# Altium PCB MotorDriverPCB.PcbDoc (part 1 of 2)
Units mm, origin at the board's own origin, x right, y up, seen from the top; angles counter-clockwise.
Board outline 100 x 50 mm, 2 copper layers (Top Layer, Bottom Layer); 108 components, 75 nets, 333 pads, 594 vias.
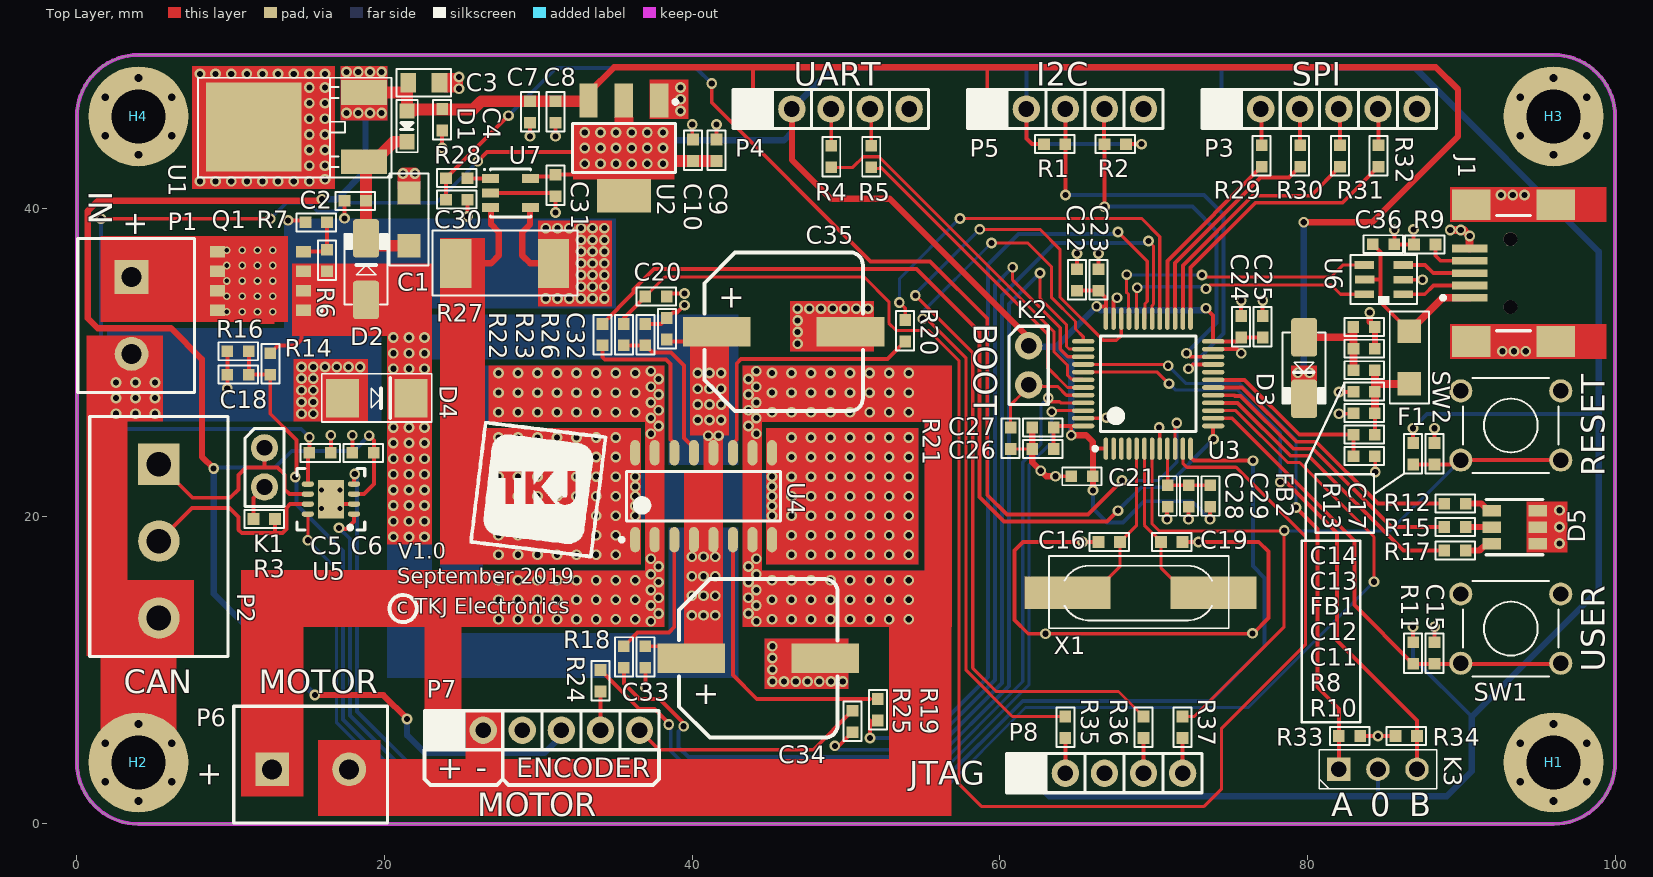
[diagram p0: Top Layer view]
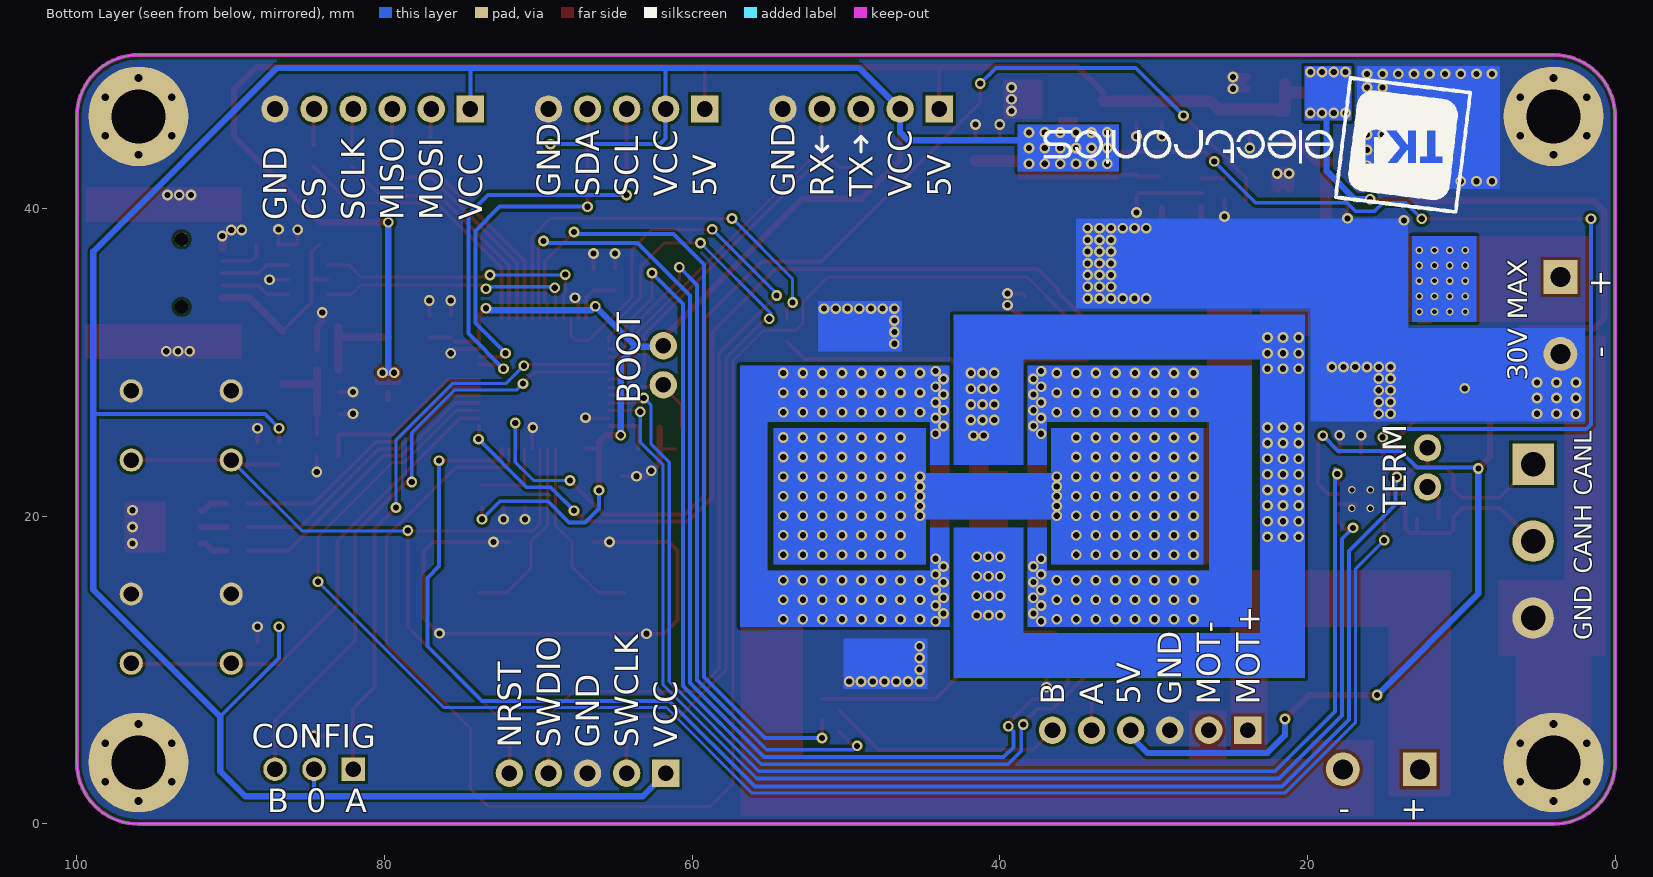
[diagram p1: Bottom Layer view, seen from below]

## Layer stack, top to bottom
Top Layer: signal copper 0.0356
Dielectric: dielectric 0.32, FR-4, Dk 4.8
Bottom Layer: signal copper 0.0356

## Board outline
0,4 ccw(c4,4) 4,0 96,0 ccw(c96,4) 100,4 100,46 ccw(c96,46) 96,50 4,50 ccw(c4,46) 0,46

## Design rules (kind name [scope] priority, off if disabled: settings)
Clearance [All] p1: gap=0.191
DiffPairsRouting [All] p1: maxlimit=0.254 minlimit=0.254 mostfreqgap=0.254 maxuncoupledlength=12.7
HoleSize [All] p1: absolutevalues=TRUE maxlimit=12.7 minlimit=0.025 maxpercent=80.000 minpercent=20.000
HoleToHoleClearance [All] p1: gap=0.203 allowstackedmicrovias=TRUE
MinimumSolderMaskSliver [All] p1: minsoldermaskwidth=0.025
PolygonConnect [All] p1: connectstyle=Direct reliefconductorwidth=0.254 reliefentries=4 polygonreliefangle="90 Angle" airgapwidth=0.254
RoutingVias [All] p1: holewidth=0.4 width=0.7 viastyle="Through Hole" minholewidth=0.4 minwidth=0.7 maxholewidth=0.4 maxwidth=0.7
SilkToSilkClearance [All] p1: silktosilkclearance=0.076
SilkscreenOverComponentPads [All] p1: minsilkscreentomaskgap=0.076
SolderMaskExpansion [All] p1: expansion=0.102
Width [All] p1: maxlimit=1.27 minlimit=0.203 preferedwidth=0.254 minimp=50.000000 maximp=50.000000 favimp=50.000000
22 further rules are at their usual default settings.

## Classes and differential pairs
differential pair USB: +USB_P -USB_N
differential pair USBX: +USBX_P -USBX_N

## Components (designator, comment, footprint, x,y, rotation, side; value= is the part's Value field where it differs from the comment)
C1 "10uF, 50V" 1206C-GENERIC 21.59,37.592 r90 top
C2 "100nF" 0603C-GENERIC 18.796,40.513 r180 top
C3 "10uF, 6.3V" 0805C-GENERIC 21.793,48.184 r0 top
C4 "100nF" 0603C-GENERIC 23.749,46.482 r270 top
C5 "100nF" 0603C-GENERIC 15.113,24.13 r0 top
C6 "100nF" 0603C-GENERIC 19.304,24.13 r180 top
C7 "1uF, 10V" 0603C-GENERIC 29.464,46.99 r270 top
C8 "100nF" 0603C-GENERIC 31.115,46.99 r270 top
C9 "1uF, 10V" 0603C-GENERIC 41.58,43.104 r90 top
C10 "100nF" 0603C-GENERIC 40.056,43.104 r90 top
C11 "4u7, 6.3V" 0603C-GENERIC 84.383,26.706 r180 top
C12 "10nF" 0603C-GENERIC 84.383,28.103 r180 top
C13 "100nF" 0603C-GENERIC 82.986,30.897 r0 top
C14 "4u7, 6.3V" 0603C-GENERIC 82.982,32.309 r0 top
C15 "100nF" 0603C-GENERIC 88.265,10.414 r90 top
C16 "18pF, NP0/COG 1%" 0603C-GENERIC 66.421,18.339 r0 top
C17 "100nF" 0603C-GENERIC 88.265,23.368 r90 top
C18 "1uF, 10V" 0603C-GENERIC 11.176,29.21 r180 top
C19 "18pF, NP0/COG 1%" 0603C-GENERIC 71.882,18.339 r180 top
C20 "10nF" 0603C-GENERIC 36.957,34.29 r0 top
C21 "100nF" 0603C-GENERIC 66.04,22.606 r180 top
C22 "100nF" 0603C-GENERIC 65.024,34.671 r90 top
C23 "4u7, 6.3V" 0603C-GENERIC 66.421,34.671 r90 top
C24 "100nF" 0603C-GENERIC 75.692,31.623 r90 top
C25 "4u7, 6.3V" 0603C-GENERIC 77.089,31.623 r90 top
C26 "100nF" 0603C-GENERIC 63.5,24.384 r180 top
C27 "4u7, 6.3V" 0603C-GENERIC 63.5,25.781 r180 top
C28 "10nF" 0603C-GENERIC 70.917,22.022 r270 top
C29 "1uF, 10V" 0603C-GENERIC 72.288,22.022 r270 top
C30 "10nF" 0603C-GENERIC 24.003,40.589 r0 top
C31 "100nF" 0603C-GENERIC 31.115,42.215 r270 top
C32 "100nF" 0603C-GENERIC 38.354,31.496 r90 top
C33 "100nF" 0603C-GENERIC 36.957,11.557 r270 top
C34 "470uF, 35V" SMT_10x10.5 44.298,10.77 r180 top
C35 "470uF, 35V" SMT_10x10.5 45.942,32.004 r180 top
C36 "100nF" 0603C-GENERIC 84.238,37.691 r0 top
D1 "DNP (NSR0530HT1G)" SOD323 21.463,46.355 r90 top
D2 "CDBA140-G" DO-214AC-SMA 18.796,36.068 r90 top
D3 "CDBA140-G" DO-214AC-SMA 79.781,29.642 r270 top
D4 "SMBJ26A" DO-214AA 17.272,27.686 r180 top
D5 "LED RGB Individual" LED-3535-6 93.472,19.304 r0 top
F1 "0ZCJ0035FF2G" 1206C-GENERIC 86.618,32.04 r270 top
FB1 "BK1608TS102" 0603FB-GENERIC 84.383,29.5 r180 top
FB2 "BK1608TS102" 0603FB-GENERIC 73.685,20.625 r90 top
H1 "SCREW-HOLE" Screw-hole-3mm 96,4 r0 top
H2 "SCREW-HOLE" Screw-hole-3mm 4,4 r0 top
H3 "SCREW-HOLE" Screw-hole-3mm 96,46 r0 top
H4 "SCREW-HOLE" Screw-hole-3mm 4,46 r0 top
J1 "USB Type B" USB-MINI-B 94.488,35.814 r180 top
K1 "JMPR2" JMPR2 12.196,24.452 r0 top
K2 "JMPR2" JMPR2 61.874,31.09 r0 top
K3 "JMPR3-23" JMPR3-CLOSED-23 82.042,3.556 r0 top
P1 "TB002-500-02BE" SCREW-2-5mm 3.556,35.56 r270 top
P2 "VI0301550000G" SCREW-3-5mm 5.334,23.39 r270 top
P3 "Header 6" HEADER-1X6 74.422,46.482 r90 top
P4 "UART1" HEADER-1X5 43.942,46.482 r90 top
P5 "I2C1" HEADER-1X5 59.182,46.482 r90 top
P6 "TB002-500-02BE" SCREW-2-5mm 12.7,3.556 r0 top
P7 "Header 6" HEADER-1X6 23.876,6.096 r90 top
P8 "JTAG" HEADER-1X5 61.722,3.302 r90 top
Q1 "AONS21321" SO8FL-DFN5x6 11.938,35.306 r180 top
R1 "4K7" 0603R-4K7 62.865,44.196 r0 top
R2 "4K7" 0603R-4K7 68.199,44.196 r180 top
R3 "120R" 0603R-120 11.485,19.829 r0 top
R4 "1K" 0603R-1k 49.042,42.69 r90 top
R5 "1K" 0603R-1k 51.642,42.69 r90 top
R6 "10K" 0603R-10K 16.256,37.338 r270 top
R7 "4K7" 0603R-4K7 16.256,39.116 r180 top
R8 "4K7" 0603R-4K7 84.383,25.309 r180 top
R9 "100K" 0603R-100K 88.32,37.679 r180 top
R10 "10K" 0603R-10K 84.383,23.912 r180 top
R11 "10K" 0603R-10K 86.868,10.414 r90 top
R12 "82R" 0603R-82 88.9,20.828 r0 top
R13 "10K" 0603R-10K 86.868,23.368 r90 top
R14 "18.2K (1%)" 0603R-18K 12.573,30.607 r270 top
R15 "56R" 0603R-56 88.9,19.304 r0 top
R16 "2.21K (1%)" 0603R-2K2 11.176,30.734 r180 top
R17 "27R" 0603R-27 88.9,17.78 r0 top
R18 "1K" 0603R-1k 35.56,10.16 r90 top
R19 "1K" 0603R-1k 52.07,6.731 r90 top
R20 "1K" 0603R-1k 53.848,32.766 r270 top
R21 "10K" 0603R-10K 60.706,24.384 r90 top
R22 "1K" 0603R-1k 34.163,32.512 r270 top
R23 "10K" 0603R-10K 35.56,32.512 r270 top
R24 "1K" 0603R-1k 34.036,10.008 r270 top
R25 "1K" 0603R-1k 50.419,5.969 r90 top
R26 "681R, 1%" 0603R-680 36.957,31.115 r90 top
R27 "8 mOhm, 1%, 1W" 2512R-GENERIC 27.813,36.449 r180 top
R28 "10K" 0603R-10K 25.4,41.986 r180 top
R29 "1K" 0603R-1k 77.022,42.736 r90 top
R30 "1K" 0603R-1k 79.522,42.736 r90 top
R31 "1K" 0603R-1k 82.122,42.736 r90 top
R32 "1K" 0603R-1k 84.622,42.736 r90 top
R33 "10K" 0603R-10K 83.439,5.715 r180 top
R34 "10K" 0603R-10K 85.725,5.715 r0 top
R35 "33R" 0603R-33 64.262,6.985 r270 top
R36 "33R" 0603R-33 69.342,6.985 r270 top
R37 "33R" 0603R-33 71.882,6.985 r270 top
SW1 "User button" TACT-TH-6x6 93.218,12.7 r180 top
SW2 "Reset" TACT-TH-6x6 93.218,25.908 r180 top
U1 "MC78M05CDTRKG" DPAK 18.669,43.053 r180 top
U2 "AZ1117EH-3.3TRG1" SOT-223 35.56,43.942 r270 top
U3 "STM32F042C6T6" STM-LQFP48_N 69.647,28.626 r90 top
U4 "VNH7070ASTR" STM-SO-16N_M 40.742,21.311 r90 top
U5 "ATA6561" VDFN8 16.514,21.124 r180 top
U6 "USBLC6" SOT23-6 86.238,34.441 r180 top
U7 "INA180A2 (50 V/V)" SOT23-5 28.194,41.021 r270 top
X1 "8MHz HC-49/US" HC-49/US 64.389,15.037 r0 top

## Footprints (in the part's own frame and the unit in brackets; to place one, negate y for a bottom-side part, rotate by r counter-clockwise, add the part's x,y. Pads: shape width x height; smd on the part's side, far side on the other; paste and mask are expansions set on the pad)
0603C-GENERIC [mil] "CAPACITOR 0603"
  rect 30x30 smd: 1(0,0) 2(55,0)
  silkscreen extent -23,-23 78,23, body extent -4,-15 59,15, height 19
0603FB-GENERIC [mil] "FERRITE BEAD 0603"
  rect 30x30 smd: 1(0,0) 2(55,0)
  silkscreen extent -23,-23 78,23, body extent -4,-15 59,15, height 20
0603R-1k [mil] "RESISTOR 0603"
  rect 30x30 smd: 1(0,0) 2(55,0)
  silkscreen extent -23,-23 78,23, body extent -4,-15 59,15, height 20
0603R-2K2 [mil] "RESISTOR 0603"
  rect 30x30 smd: 1(0,0) 2(55,0)
  silkscreen extent -23,-23 78,23, body extent -4,-15 59,15, height 20
0603R-4K7 [mil] "RESISTOR 0603"
  rect 30x30 smd: 1(0,0) 2(55,0)
  silkscreen extent -23,-23 78,23, body extent -4,-15 59,15, height 20
0603R-10K [mil] "RESISTOR 0603"
  rect 30x30 smd: 1(0,0) 2(55,0)
  silkscreen extent -23,-23 78,23, body extent -4,-15 59,15, height 20
0603R-18K [mil] "RESISTOR 0603"
  rect 30x30 smd: 1(0,0) 2(55,0)
  silkscreen extent -23,-23 78,23, body extent -4,-15 59,15, height 20
0603R-27 [mil] "RESISTOR 0603"
  rect 30x30 smd: 1(0,0) 2(55,0)
  silkscreen extent -23,-23 78,23, body extent -4,-15 59,15, height 20
0603R-33 [mil] "RESISTOR 0603"
  rect 30x30 smd: 1(0,0) 2(55,0)
  silkscreen extent -23,-23 78,23, body extent -4,-15 59,15, height 20
0603R-56 [mil] "RESISTOR 0603"
  rect 30x30 smd: 1(0,0) 2(55,0)
  silkscreen extent -23,-23 78,23, body extent -4,-15 59,15, height 20
0603R-82 [mil] "RESISTOR 0603"
  rect 30x30 smd: 1(0,0) 2(55,0)
  silkscreen extent -23,-23 78,23, body extent -4,-15 59,15, height 20
0603R-100K [mil] "RESISTOR 0603"
  rect 30x30 smd: 1(0,0) 2(55,0)
  silkscreen extent -23,-23 78,23, body extent -4,-15 59,15, height 20
0603R-120 [mil] "RESISTOR 0603"
  rect 30x30 smd: 1(0,0) 2(55,0)
  silkscreen extent -23,-23 78,23, body extent -4,-15 59,15, height 20
0603R-680 [mil] "RESISTOR 0603"
  rect 30x30 smd: 1(0,0) 2(55,0)
  silkscreen extent -23,-23 78,23, body extent -4,-15 59,15, height 20
0805C-GENERIC [mil] "CAPACITOR 0805"
  rect 40x50 smd: 1(-10,0) 2(70,0)
  silkscreen extent -40,-35 100,35, body extent -11,-25 70,25, height 26
1206C-GENERIC [mil]
  rect 60x60 smd: 1(0,0) 2(135,0)
  silkscreen extent -50,-50 185,50, body extent -8,-29 147,29, height 46
2512R-GENERIC [mil]
  rect 80x125 smd: 1(-125,0) 2(125,0)
  silkscreen extent -186,-84 185,83, body extent -139,-61 136,61, height 19
DO-214AA [mm]
  rect 2.16x2.5 smd: A(0,0) K(-4.45,0)
  silkscreen extent -5.8,-1.58 1.35,1.55, body extent -4.9,-1.45 0.4,1.43, height 2.23
DO-214AC-SMA [mm] "JEDEC DO214 variation AC. SMA"
  round 0.508 on Mech15: 0(0,0)
  rrect25% 2.5x1.7 smd: A(-2,0) K(2,0)
  silkscreen extent -2.3,-1.4 2.3,1.4, body extent -2.6,-1.3 2.6,1.3, height 2.42
DPAK [mm]
  rect 3x1.6 smd: 1(0,0) 3(0,-4.5)
  rect 6.2x5.8 smd: 2(7.18,-2.25)
  silkscreen extent -1.78,-5.46 10.79,1.02, body extent -0.25,-5.18 9.98,0.67, height 2.38
HC-49/US [mm]
  rect 5.6x2.1 smd: 1(0,0) 2(9.5,0)
  silkscreen extent -1.19,-2.31 10.5,2.39, body extent -2.17,-2.3 11.72,2.39, height 3.05
HEADER-1X5 [mil]
  rect 70x70 hole 40: 1(0,0)
  round 70 hole 40: 2(0,-100) 3(0,-200) 4(0,-300) 5(0,-400)
  silkscreen extent -50,-450 50,50, body extent -50,-450 50,50, height 470
HEADER-1X6 [mil]
  rect 70x70 hole 40: 1(0,0)
  round 70 hole 40: 2(0,-100) 3(0,-200) 4(0,-300) 5(0,-400) 6(0,-500)
  silkscreen extent -50,-550 50,50, body extent -50,-550 50,50, height 470
JMPR2 [mil]
  round 70 hole 40: 1(0,0) 2(0,-100)
  silkscreen extent -50,-150 50,50, body extent -50,-150 50,50, height 300
JMPR3-CLOSED-23 [mil]
  rect 60x60 hole 40: 1(0,0)
  round 60 hole 40: 2(100,0) 3(200,0)
  silkscreen extent -50,-50 250,50, body extent -50,-50 250,50, height 300
LED-3535-6 [mm] "SMD Full-color Top LED Diffused, body 3.7x3.5mm"
  rect 1.2x0.75 smd: AB(-1.5,-1.075) AG(-1.5,0) AR(-1.5,1.075) KB(1.5,-1.075) KG(1.5,0) KR(1.5,1.075)
  silkscreen extent -1.85,-1.8 1.85,1.8, body extent -1.85,-1.75 1.85,1.75, height 2.8
SCREW-2-5mm [mm]
  rect 2.2x2.2 hole 1.3: 1(0,0)
  round 2.2 hole 1.3: 2(5,0)
  silkscreen extent -2.5,-3.5 7.5,4.1, body extent -2.5,-3.1 7.5,4.5, height 9.8
SCREW-3-5mm [mm]
  rect 2.7x2.7 hole 1.6: 1(0,0)
  round 2.7 hole 1.6: 2(5,0) 3(10,0)
  silkscreen extent -3.1,-4.5 12.5,4.5, body extent -2.8,-5.2 12.5,5, height 14.1
Screw-hole-3mm [mm] "M3 screw"
  round 6.5 hole 3.5 mask+0: 0(0,0)
SMT_10x10.5 [mm] "Aluminium Electrolytic V-Chip SMT Capacitors, Ф10x10.5mm"
  rect 4.4x1.9 smd: 1(4.35,0) 2(-4.35,0)
  silkscreen extent -5.15,-5.15 5.15,5.15, body extent -5.5,-5.15 5.5,5.15, height 10.5
SO8FL-DFN5x6 [mm] "DFN, 5-Leads, Body 5.9x4.9mm, Pitch 1.27mm"
  rect 1x0.75 smd: D(2.795,1.905) D(2.795,-0.635) D(2.795,0.635) D(2.795,-1.905) G(-2.795,-1.905) S(-2.795,1.905) S(-2.795,-0.635) S(-2.795,0.635)
  Top Layer region: -0.905,-2.775 -0.905,-2.28 -1.33,-2.28 -1.33,2.28 -0.905,2.28 -0.905,2.775 0,2.775 0,2.28 3.2,2.28 3.2,1.53 2.725,1.53 2.725,-1.53 3.2,-1.53 3.2,-2.28 0,-2.28 0,-2.775
  silkscreen extent -3.97,1.78 -3.72,2.03, body extent -2.95,-2.45 2.95,2.45, height 1.1
SOD323 [mm]
  rect 1x1 smd: A(0,0) K(-2,0)
  silkscreen extent -2.69,-0.69 0.71,0.69, body extent -2.23,-0.65 0.18,0.65, height 0.74
SOT23-5 [mm] "SOT-23/SC-74A; 5 Leads; Body 3 x 3 mm, inc. leads (LxW max)"
  rect 0.6x1.1 smd: 1(-0.95,-1.3) 2(0,-1.3) 3(0.95,-1.3) 4(0.95,1.3) 5(-0.95,1.3)
  silkscreen extent -1.57,-1.75 1.55,1.33
SOT23-6 [mil]
  rect 50x20 smd: 1(0,0) 2(0,-37) 3(0,-75) 4(100,-75) 5(99.41,-37.4) 6(100,0)
  silkscreen extent -35,-100 135,25, body extent 2,-95 98,20, height 52
SOT-223 [mm] "SOT223, 4-Leads, Body 6.5x3.5mm, Pitch 2.3mm, Lead Span 7mm, IPC Medium Density"
  rect 2.2x1.2 smd: 1(-3.1,2.3) 2(-3.1,0) 3(-3.1,-2.3)
  rect 2.2x3.5 smd: 4(3.1,0)
  silkscreen extent -3.12,-3.35 1.6,3.48, body extent -1.85,-3.35 1.85,3.35, height 1.8
STM-LQFP48_N [mm] "QFP, 48-Leads, Body 7x7mm, Pitch 0.5mm, IPC Medium Density"
  oval 1.45x0.3 smd: 1(-4.225,2.75) 2(-4.225,2.25) 3(-4.225,1.75) 4(-4.225,1.25) 5(-4.225,0.75) 6(-4.225,0.25) 7(-4.225,-0.25) 8(-4.225,-0.75) 9(-4.225,-1.25) 10(-4.225,-1.75) 11(-4.225,-2.25) 12(-4.225,-2.75) 25(4.225,-2.75) 26(4.225,-2.25) 27(4.225,-1.75) 28(4.225,-1.25) 29(4.225,-0.75) 30(4.225,-0.25) 31(4.225,0.25) 32(4.225,0.75) 33(4.225,1.25) 34(4.225,1.75) 35(4.225,2.25) 36(4.225,2.75)
  oval 0.3x1.45 smd: 13(-2.75,-4.225) 14(-2.25,-4.225) 15(-1.75,-4.225) 16(-1.25,-4.225) 17(-0.75,-4.225) 18(-0.25,-4.225) 19(0.25,-4.225) 20(0.75,-4.225) 21(1.25,-4.225) 22(1.75,-4.225) 23(2.25,-4.225) 24(2.75,-4.225) 37(2.75,4.225) 38(2.25,4.225) 39(1.75,4.225) 40(1.25,4.225) 41(0.75,4.225) 42(0.25,4.225) 43(-0.25,4.225) 44(-0.75,4.225) 45(-1.25,4.225) 46(-1.75,4.225) 47(-2.25,4.225) 48(-2.75,4.225)
  silkscreen extent -4.35,-3.1 3.1,3.57, body extent -3.5,-3.5 3.5,3.5, height 1.6
STM-SO-16N_M [mm] "SOIC, 16-Leads, Body 10x4mm, Pitch 1.27mm, IPC Low Density"
  oval 1.65x0.65 smd: 1(-2.825,4.445) 2(-2.825,3.175) 3(-2.825,1.905) 4(-2.825,0.635) 5(-2.825,-0.635) 6(-2.825,-1.905) 7(-2.825,-3.175) 8(-2.825,-4.445) 9(2.825,-4.445) 10(2.825,-3.175) 11(2.825,-1.905) 12(2.825,-0.635) 13(2.825,0.635) 14(2.825,1.905) 15(2.825,3.175) 16(2.825,4.445)
  silkscreen extent -2.95,-5 1.6,5.44, body extent -3,-5 3,5, height 1.75
TACT-TH-6x6 [mm] "6*6mm vertical type, THT, height 4.3mm, white actuator, 260gf, Bulk"
  round 1.5 hole 1: 1(-3.25,2.25) 2(3.25,2.25) 3(-3.25,-2.25) 4(3.25,-2.25)
  silkscreen extent -3.1,-3.1 3.1,3.1, body extent -3.95,-3.1 3.95,3.1, height 4.3
USB-MINI-B [mm] "EDAC_690-005-299-043_0"
  rect 2.3x0.5 smd: 1(3.95,1.6) 2(3.95,0.8) 3(3.95,0) 4(3.95,-0.8) 5(3.95,-1.6)
  rect 2.5x2 smd: SH(-1.65,4.45) SH(-1.65,-4.45) SH(3.85,4.45) SH(3.85,-4.45)
  round 0.9 hole 0.9 unplated paste-1000 mask+0: ""(1.3,2.2) ""(1.3,-2.2)
  silkscreen extent 0,-3.75 5.8,3.75, body extent -4.57,-4.62 4.63,4.63, height 3.88
VDFN8 [mm] "8-Lead Very Thin Plastic Dual Flat, No Lead Package (Q8B) - 3x3 mm Body [VDFN] With  2.40x1.60 mm Exposed Pad and Stepped Wettable Flanks"
  oval 0.8x0.35 smd: 1(-1.5,0.975) 2(-1.5,0.325) 3(-1.5,-0.325) 4(-1.5,-0.975) 5(1.5,-0.975) 6(1.5,-0.325) 7(1.5,0.325) 8(1.5,0.975)
  rect 1.7x2.5 smd: 9(0,0)
  silkscreen extent -2.2,-2 2.2,2, body extent -1.5,-1.5 1.5,1.5, height 1.73

## Part data
C1: library part 1206C-10U-35V-X7R, "GENERIC CAPACITOR NON POLARISED 1206"
C2 C4 C5 C6 C8 C10 C13 C15 C17 C21 C22 C24 C26 C31 C32 C33 C36: library part 0603C-100NF-25V-X7R-TDK, "GENERIC CAPACITOR NON POLARISED 0603"
C3: library part 0805C-10UF-6V3-X5R-PAN, "CAPACITOR 0805 CERAMIC"
C7 C9 C18 C29: library part 0603C-1UF-35V-X5R-TAY, "CAPACITOR 0603 CERAMIC"
C11 C14 C23 C25 C27: library part 0603C-4U7-6V3-X5R-KEM, "GENERIC CAPACITOR NON POLARISED 0603"
C12 C20 C28 C30: library part 0603C-10NF-50V-X7R-MUR, "GENERIC CAPACITOR NON POLARISED 0603"
C16 C19: library part 0603C-15PF-50V-C0G-MUR, "GENERIC CAPACITOR NON POLARISED 0603"
C34 C35: library part AluCap_SMT, "Surface mount, Polarized Electrolytic Aluminum Capacitor"
D1 D2 D3: library part DIODE_SCHOTTKY, "Diode Schottky"
D4: library part DIODE_TVS, "Diode SMD Transil"
F1: library part FUSE-PTC, "PTC Resettable Fuse"
FB1 FB2: library part 0603FB-GENERIC, "FERRITE BEAD SMD"
H1 H2 H3 H4: "PCB Screw hole"
J1: library part USB-Type-B, "Connector SMD-THD USB Type B middle mount"
K1 K2: "JMPR2 OPEN BY DEFAULT"
K3: "JMPR3"
P1 P6: library part SCREW-2, "Screw terminal, 2-pin, 5mm pitch"
P2: library part SCREW-3, "Screw terminal, 3-pin, 5mm pitch"
P3 P7: "Header, 6-Pin"
P4 P5 P8: library part "Header 5", "Header, 5-Pin"
Q1: library part MOSFET-P, "P-Channel MOSFET"
R1 R2 R7 R8: library part 0603R-4K7, "GENERIC RESISTOR 0603"
R3: library part 0603R-120, "GENERIC RESISTOR 0603"
R4 R5 R18 R19 R20 R22 R24 R25 R29 R30 R31 R32: library part 0603R-1K, "GENERIC RESISTOR 0603"
R6 R10 R11 R13 R21 R23 R28 R33 R34: library part 0603R-10K, "GENERIC RESISTOR 0603"
R9: library part 0603R-100K, "GENERIC RESISTOR 0603"
R12: library part 0603R-82R, "GENERIC RESISTOR 0603"
R14: library part 0603R-18K, "GENERIC RESISTOR 0603"
R15: library part 0603R-56R, "GENERIC RESISTOR 0603"
R16: library part 0603R-2K2, "GENERIC RESISTOR 0603"
R17: library part 0603R-27R, "GENERIC RESISTOR 0603"
R26: library part 0603R-680, "GENERIC RESISTOR 0603"
R27: library part 2512R, "POWER RESISTOR 2512"
R35 R36 R37: library part 0603R-33, "GENERIC RESISTOR 0603"
SW1 SW2: library part "Tactile Switch", "Tactile Switch"
U1: "5V, 500mA, LDO Regulator, 3-Pin DDPAK"
U2: "3.3V, 1A, LDO Regulator, 3-Pin SOT-223"
U3: "IC MCU 32BIT 32KB FLASH 48LQFP"
U4: "SO 16 .15 TO JEDEC MS-012"
U5: "High-Speed CAN Transceiver with Standby Mode  CAN FD Ready"
U6: "Very low capacitance ESD protection"
U7: library part INA180A, "INAx180 Low- and high-side voltage output, current-sense amplifiers"
X1: library part HC-49/US, "HC-49/US"

## Via types
v1: diameter 0.7, hole 0.4, Top Layer to Bottom Layer, tented both sides, 546 vias
v2: diameter 1, hole 0.5, Top Layer to Bottom Layer, 24 vias
v3: diameter 0.5, hole 0.3, Top Layer to Bottom Layer, tented bottom, 20 vias
v4: diameter 0.5, hole 0.33, Top Layer to Bottom Layer, tented bottom, 4 vias

## Nets (pads, with @x,y where several pads share a name; then routed paths per layer and width w, separated by ;. In a path a pad name is that pad's centre, name@x,y a point inside that pad or via, vN(x,y) a via of type N, cw(c..) or ccw(c..) an arc to the next point about the centre after c; other vN are vias at no path point)
5V: C3.1 C4.1 C6.1 C7.1 C8.1 D1.A D3.K P4.1 P5.1 P7.4 U1.3 U2.3 U5.3 | length 206.6
  Top Layer w0.254: U5.3@18.014,21.449 18.655,21.449 19.304,22.098 C6.1@19.304,24.13 19.304,24.943 v1(18.999,25.248) ; U2.3@33.26,47.042 U2.3@33.26,47.535 ; P4.1@43.942,46.482 43.942,49.149 ; P5.1@59.182,46.482 59.182,49.149 59.233,49.2
  Top Layer w0.406: v1(8.89,23.114) 8.128,23.876 8.128,30.226 6.121,32.233 1.356,32.233 0.711,32.877 0.711,39.853 1.372,40.513 v1@15.824,40.513 ; v1(15.469,8.382) 19.914,8.382 v1(21.463,6.833) ; C7.1@29.464,46.99 C8.1@30.988,46.99 ; U2.3@33.26,47.535 34.925,49.2 59.233,49.2 88.341,49.2 89.789,47.752 89.789,44.704 84.201,39.116 v1(79.756,39.116) ; D3.K@79.781,27.642 D3.K@79.781,28.042
  Top Layer w0.762: U1.3@18.669,47.553 C3.1@21.433,47.553 ; C3.1@21.463,48.108 D1.A@21.463,46.355 D1.A@21.844,46.355 ; D1.A@21.565,46.457 25.756,46.457 26.289,46.99 C7.1@29.464,46.99 C8.1@31.115,46.99 33.208,46.99 U2.3@33.26,47.042
  Bottom Layer w0.254: v1@8.941,23.165 12.878,23.165 13.97,24.257 18.009,24.257 v1(18.999,25.248)
  Bottom Layer w0.406: v1(8.89,23.114) 8.89,14.961 v1(15.469,8.382) ; v1(15.926,40.615) 16.916,40.615 18.755,42.453 18.755,47.203 ; v1(21.463,6.833) 21.463,5.766 22.606,4.623 30.404,4.623 31.496,5.715 P7.4@31.496,6.096 ; 79.756,29.337 v1(79.756,39.116)
  other v1: 79.375,29.337 80.137,29.337 17.526,46.228 18.288,46.228 19.05,46.228 19.812,46.228 17.526,48.895 18.288,48.895 19.05,48.895 19.812,48.895
BOOT: K2.2 R21.2 U3.44 | length 6.9
  Top Layer w0.203: R21.2@60.706,25.781 60.706,27.254 61.443,27.991 61.9,28.448 63.754,28.448 64.326,27.876 U3.44@65.422,27.876
BTN: C15.1 R11.1 SW1.1 SW1.2 U3.14 | length 31.6
  Top Layer w0.254: U3.14@73.872,26.376 75.097,26.376 83.058,18.415 83.058,14.224 R11.1@86.868,10.414 C15.1@88.265,10.414 SW1.1@96.432,10.414
CAN_RX: U3.45 U5.4 | length 85.6
  Top Layer w0.203: v1@63.102,27.452 63.887,27.452 63.963,27.376 U3.45@65.422,27.376
  Top Layer w0.254: U5.4@18.014,22.099 18.014,22.967 v1@18.059,22.922
  Bottom Layer w0.203: 55.662,3.429 61.493,9.261 61.493,23.52 62.687,24.714 62.687,27.26 v1@63.105,27.678
  Bottom Layer w0.254: v1@18.059,22.922 18.212,23.074 18.212,7.315 22.098,3.429 55.662,3.429
  other v1: 18.059,22.758 63.144,27.686
CAN_STBY: U3.15 U5.8 | length 106.1
  Top Layer w0.203: v1(15.014,18.443) U5.8@15.014,20.149 ; U3.15@73.872,26.876 75.349,26.876 78.719,23.506 79.491,23.506 84.328,18.669 v1(84.328,15.748)
  Bottom Layer w0.203: v1(15.014,18.443) 16.866,16.591 16.866,6.614 21.473,2.007 56.107,2.007 61.67,7.569 76.149,7.569 v1(84.328,15.748)
CAN_TX: U3.46 U5.1 | length 83
  Top Layer w0.203: v1(63.373,26.797) 63.452,26.876 U3.46@65.422,26.876
  Top Layer w0.254: v1(17.043,19.253) 17.12,19.177 17.526,19.177 18.014,19.665 U5.1@18.014,20.149
  Bottom Layer w0.203: 55.79,2.946 61.9,9.056 61.9,23.352 63.373,24.825 v1(63.373,26.797)
  Bottom Layer w0.254: v1(17.043,19.253) 17.755,18.542 17.755,7.054 21.862,2.946 55.79,2.946
CS: C30.1 R28.2 U3.10 | length 76.8
  Top Layer w0.203: U3.10@71.397,24.401 v1@71.397,25.956
  Top Layer w0.254: C30.1@24.003,40.589 R28.2@24.003,41.986 v1(28.067,46.05) ; v1(41.275,48.133) 41.275,46.904 51.603,36.576 55.474,36.576 59.182,32.868 59.182,21.398 60.464,20.117 65.735,20.117 v1(67.945,22.327)
  Bottom Layer w0.203: v1(67.945,22.327) 70.307,22.327 71.501,23.52 v1(71.501,26.06)
  Bottom Layer w0.254: v1(28.067,46.05) 31.166,49.149 40.259,49.149 v1(41.275,48.133)
ENC_A: R24.1 U3.38 | length 66
  Top Layer w0.203: v1(62.611,35.814) 62.611,34.188 64.338,32.461 64.338,31.039 64.501,30.876 U3.38@65.422,30.876
  Top Layer w0.254: R24.1@34.036,10.008 36.551,7.493 37.541,7.493 v1@38.278,6.756
  Bottom Layer w0.254: v1@38.608,6.426 38.608,4.75 39.472,3.886 55.508,3.886 60.604,8.982 60.604,33.807 v1(62.611,35.814)
  other v1: 38.481,6.477
ENC_B: R25.1 U3.39 | length 49.5
  Top Layer w0.203: v1(60.833,36.195) 60.833,35.357 63.932,32.258 63.932,30.87 64.426,30.376 U3.39@65.422,30.376
  Top Layer w0.254: v1(49.276,5.08) 49.53,5.08 R25.1@50.419,5.969
  Bottom Layer w0.254: v1(49.276,5.08) 49.53,4.826 55.155,4.826 59.69,9.361 59.69,35.052 v1(60.833,36.195)
GND: C1.2 C2.2 C3.2 C4.2 C5.2 C6.2 C7.2 C8.2 C9.2 C10.2 C11.2 C12.2 C13.2 C14.2 C15.2 C16.1 C17.2 C18.2 C19.1 C20.2 C21.2 C22.2 C23.2 C24.2 C25.2 C26.2 C27.2 C28.2 C29.2 C30.2 C31.2 C32.2 C33.2 C34.2 C35.2 C36.2 D4.A D5.KB D5.KG D5.KR H1.0 H2.0 H3.0 H4.0 J1.5 J1.SH P1.2 P2.3 P3.6 P4.5 P5.5 P7.3 P8.3 R7.2 R9.2 R10.1 R16.2 R21.1 R26.2 R27.1 R33.1 R34.1 SW1.3 SW1.4 SW2.3 SW2.4 U1.2 U2.1 U3.8 U3.23 U3.35 U3.47 U5.2 U5.9 U6.2 U7.2 U7.4 | length 111.4
  Top Layer w0.203: 61.087,24.384 C26.2@62.103,24.384
  Top Layer w0.254: v1(9.779,28.321) C18.2@9.779,29.21 R16.2@9.779,30.734 ; v1(13.716,39.243) R7.2@14.732,39.243 ; C5.2@16.51,24.13 v1(16.51,25.273) ; U5.9@16.839,20.799 U5.2@18.014,20.799 ; v1@17.399,39.675 C2.2@17.399,40.513 ; C6.2@17.907,24.13 v1(17.907,25.273) ; v1(23.749,43.942) C4.2@23.749,45.085 ; v1(25.4,39.497) C30.2@25.4,40.589 ; U7.2@26.894,41.021 C31.2@30.988,41.021 ; v1(29.464,44.704) C7.2@29.464,45.593 ; v1(31.115,39.751) C31.2@31.115,40.818 ; v1(31.115,44.704) C8.2@31.115,45.593 ; v1(36.957,8.89) C33.2@36.957,10.16 ; R26.2@36.957,32.512 37.973,32.512 C32.2@38.354,32.893 38.383,32.893 38.748,33.259 39.025,33.259 v1(39.497,33.731) ; C20.2@38.354,34.29 38.557,34.493 v1(39.497,34.493) ; C10.2@40.005,44.552 v1(40.005,45.466) ; C9.2@41.58,44.501 v1(41.58,45.466) ; v1(63.627,22.606) C21.2@64.643,22.606 ; C22.2@65.024,36.068 v1(65.024,37.084) ; U3.47@65.422,26.376 v1@66.889,26.376 ; C16.1@66.421,18.339 61.519,18.339 60.96,17.78 60.96,13.259 61.849,12.37 76.454,12.37 77.47,13.386 77.47,17.704 76.835,18.339 C19.1@71.882,18.339 ; C23.2@66.421,36.068 v1(66.421,37.084) ; U3.35@67.397,32.851 67.397,33.996 v1(67.615,34.214) ; U3.8@70.397,24.401 v1@70.397,25.742 ; v1(70.866,19.812) C28.2@70.866,20.574 ; v1(72.263,19.812) C29.2@72.263,20.599 ; U3.23@73.872,30.876 75.423,30.876 v1(75.692,30.607) ; C24.2@75.692,33.02 v1(75.692,34.036) ; C25.2@77.089,33.02 v1(77.089,34.036) ; v1(82.042,26.67) C11.2@82.95,26.67 ; v1(82.042,28.092) C12.2@82.975,28.092 ; R33.1@83.439,5.715 R34.1@85.725,5.715 ; v1(84.404,22.885) R10.1@84.404,23.891 ; C36.2@85.647,37.679 R9.2@86.923,37.679 86.893,37.708 v1@86.893,38.633 ; C36.2@85.649,37.705 v1(85.649,38.633) ; U6.2@86.238,35.381 v1@87.476,35.381 ; C15.2@88.265,11.811 v1(88.265,12.827) ; C17.2@88.265,24.765 v1(88.265,25.73) ; D5.KB@94.972,18.229 v1@96.325,18.229 ; D5.KG@94.972,19.304 v1(96.393,19.304) ; D5.KR@94.972,20.379 v1@96.334,20.379
  Top Layer w0.406: U7.4@29.464,40.071 29.464,38.989 28.956,38.481 28.956,36.957 29.464,36.449 R27.1@31.369,36.449 ; C27.2@62.103,25.781 C26.2@62.103,24.384 62.103,23.52 63.017,22.606 v1(63.627,22.606) ; v1(84.049,33.249) 84.049,32.639 C14.2@84.379,32.309 84.383,32.305 C13.2@84.383,30.897
  Top Layer w0.508: C3.2@23.952,47.803 v1(24.841,47.803) v1(24.841,48.565) C3.2@23.952,48.565 ; v1(89.281,38.608) 90.17,38.608 v1(90.551,38.227) ; J1.5@90.538,37.414 v1@90.538,38.214
  Top Layer w0.762: C1.2@21.209,41.402 v1(21.209,42.291) v1(21.971,42.291) C1.2@21.971,41.402
  other v1: 84.582,5.715 45.212,9.271 45.974,9.271 46.736,9.271 47.498,9.271 48.26,9.271 49.022,9.271 49.784,9.271 45.212,10.033 45.212,10.795 45.212,11.557 62.967,12.37 76.429,12.395 96.393,18.237 65.38,18.339 72.923,18.339 96.393,20.396 62.662,22.962 70.358,25.781 66.929,26.416 2.54,26.67 3.81,26.67 5.08,26.67 14.605,26.67 15.367,26.67 14.605,27.432 15.367,27.432 2.54,27.686 3.81,27.686 5.08,27.686 14.605,28.194 15.367,28.194 2.54,28.702 3.81,28.702 5.08,28.702 14.605,28.956 15.367,28.956 14.605,29.718 15.367,29.718 16.129,29.718 16.891,29.718 17.653,29.718 18.415,29.718 92.669,30.734 93.431,30.734 94.193,30.734 46.856,31.217 46.856,31.979 46.856,32.741 46.856,33.503 47.618,33.503 48.38,33.503 49.142,33.503 49.904,33.503 50.666,33.503 51.428,33.503 30.48,34.163 31.242,34.163 32.004,34.163 32.766,34.163 33.528,34.163 34.29,34.163 32.766,34.925 33.528,34.925 34.29,34.925 87.478,35.382 32.766,35.687 33.528,35.687 34.29,35.687 32.766,36.449 33.528,36.449 34.29,36.449 32.766,37.211 33.528,37.211 34.29,37.211 32.766,37.973 33.528,37.973 34.29,37.973 89.967,38.608 86.893,38.659 30.48,38.735 31.242,38.735 32.004,38.735 32.766,38.735 33.528,38.735 34.29,38.735 17.393,39.375 92.583,40.894 93.345,40.894 94.107,40.894 8.001,41.783 9.017,41.783 10.033,41.783 11.049,41.783 12.065,41.783 13.081,41.783 14.097,41.783 15.113,41.783 16.129,41.91 15.113,42.799 16.129,42.799 15.113,43.815 16.129,43.815 15.113,44.831 16.129,44.831 15.113,45.847 16.129,45.847 39.243,46.355 15.113,46.863 16.129,46.863 39.243,47.117 15.113,47.879 16.129,47.879 39.243,47.879 8.001,48.768 9.017,48.768 10.033,48.768 11.049,48.768 12.065,48.768 13.081,48.768 14.097,48.768 15.113,48.768 16.129,48.768
  other v2: 4,1.5 96,1.5 1.835,2.75 6.165,2.75 93.835,2.75 98.165,2.75 1.835,5.25 6.165,5.25 93.835,5.25 98.165,5.25 4,6.5 96,6.5 4,43.5 96,43.5 1.835,44.75 6.165,44.75 93.835,44.75 98.165,44.75 1.835,47.25 6.165,47.25 93.835,47.25 98.165,47.25 4,48.5 96,48.5
  other v4: 15.914,20.524 17.114,20.524 15.914,21.724 17.114,21.724
I2C1_SCL: P5.3 R1.2 U3.21 | length 29.1
  Top Layer w0.254: v1(64.262,40.894) R1.2@64.262,44.196 ; R1.2@64.282,44.187 P5.3@64.282,46.462 ; v1(72.263,29.591) 72.548,29.876 U3.21@73.872,29.876
  Bottom Layer w0.254: v1(64.262,40.894) 73.279,40.894 74.549,39.624 74.549,31.877 v1(72.263,29.591)
I2C1_SDA: P5.4 R2.2 U3.22 | length 24.9
  Top Layer w0.254: R2.2@66.782,44.187 P5.4@66.782,46.462 ; v1(66.802,40.132) R2.2@66.802,44.196 ; v1(72.136,30.607) 72.367,30.376 U3.22@73.872,30.376
  Bottom Layer w0.254: v1(66.802,40.132) 72.517,40.132 74.092,38.557 74.092,32.563 v1(72.136,30.607)
INA: R18.1 U3.30 | length 71.9
  Top Layer w0.203: v1(69.666,37.903) 69.99,37.579 69.99,33.795 69.897,33.702 U3.30@69.897,32.851
  Top Layer w0.254: R18.1@35.56,10.16 35.56,9.144 36.576,8.128 37.868,8.128 39.37,6.626 v1@39.37,6.604
  Bottom Layer w0.254: v1(39.446,6.35) 39.116,6.02 39.116,4.978 39.751,4.343 55.319,4.343 60.147,9.172 60.147,34.366 63.545,37.764 v1@69.528,37.764